# Altium PCB Huitzil2.PcbDoc
Units mm, origin at the board's own origin, x right, y up, seen from the top; angles counter-clockwise.
Board outline 100.03 x 55.02 mm, 2 copper layers (Top Layer, Bottom Layer); 17 components, 42 nets, 89 pads, 0 vias.
Unrouted connection lines stored in the file: 9.
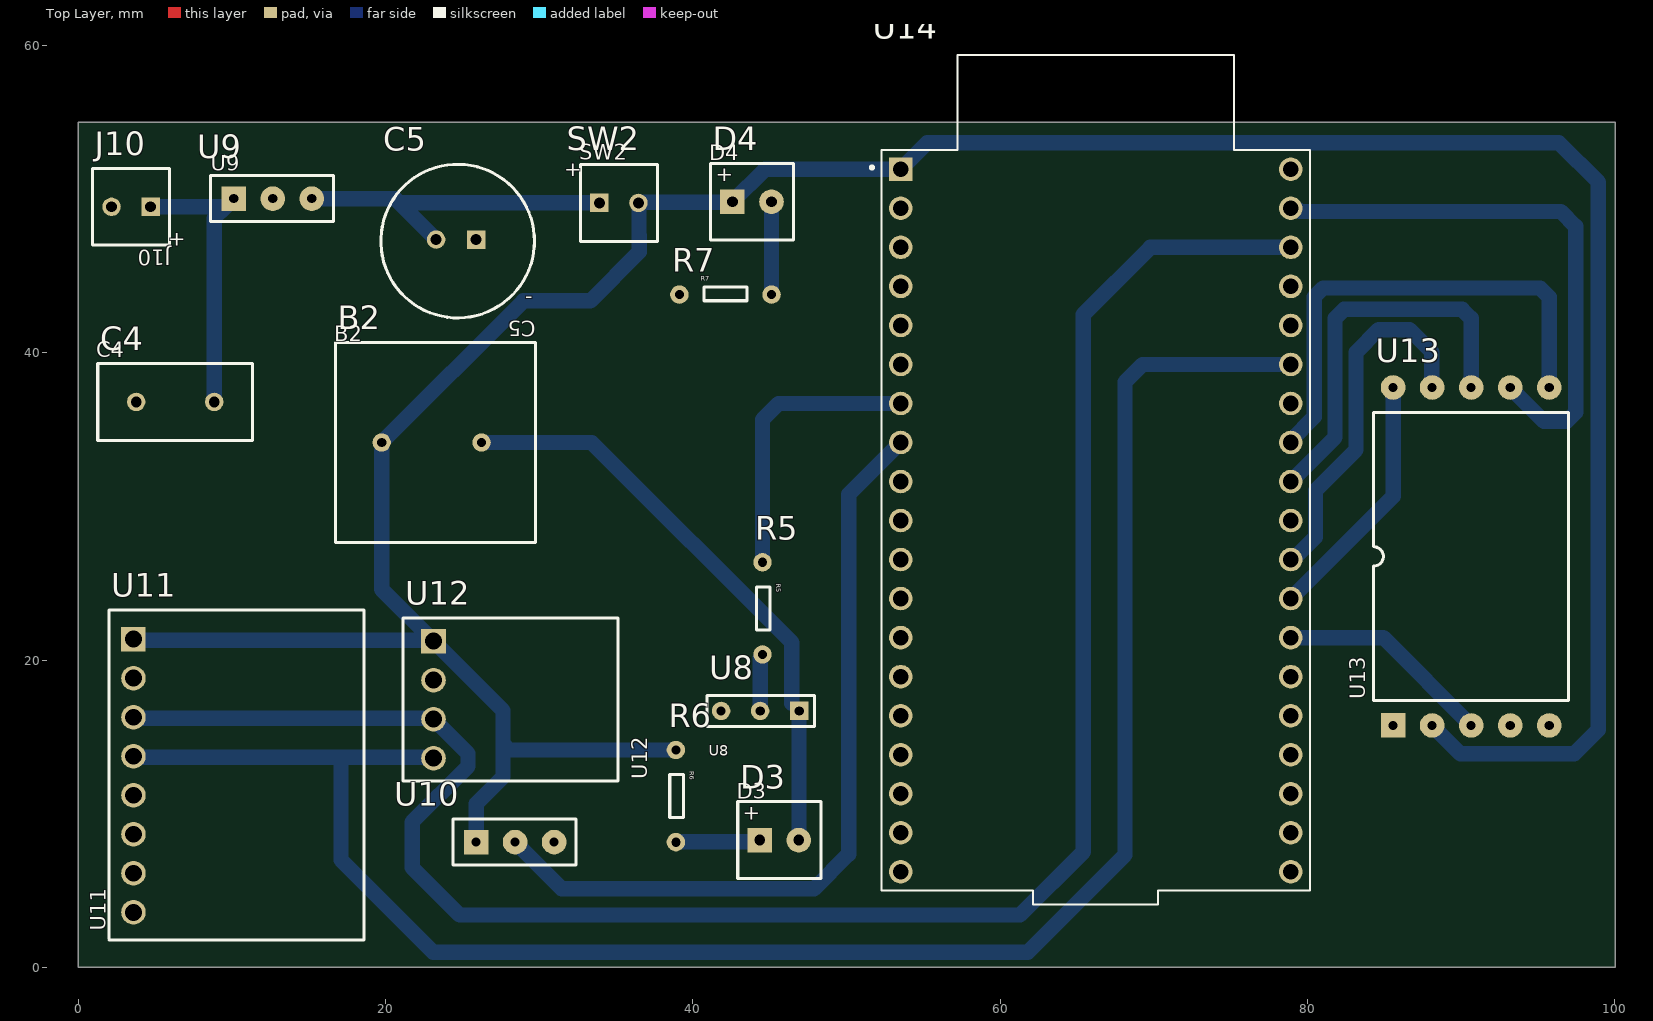
[diagram p0: Top Layer view]
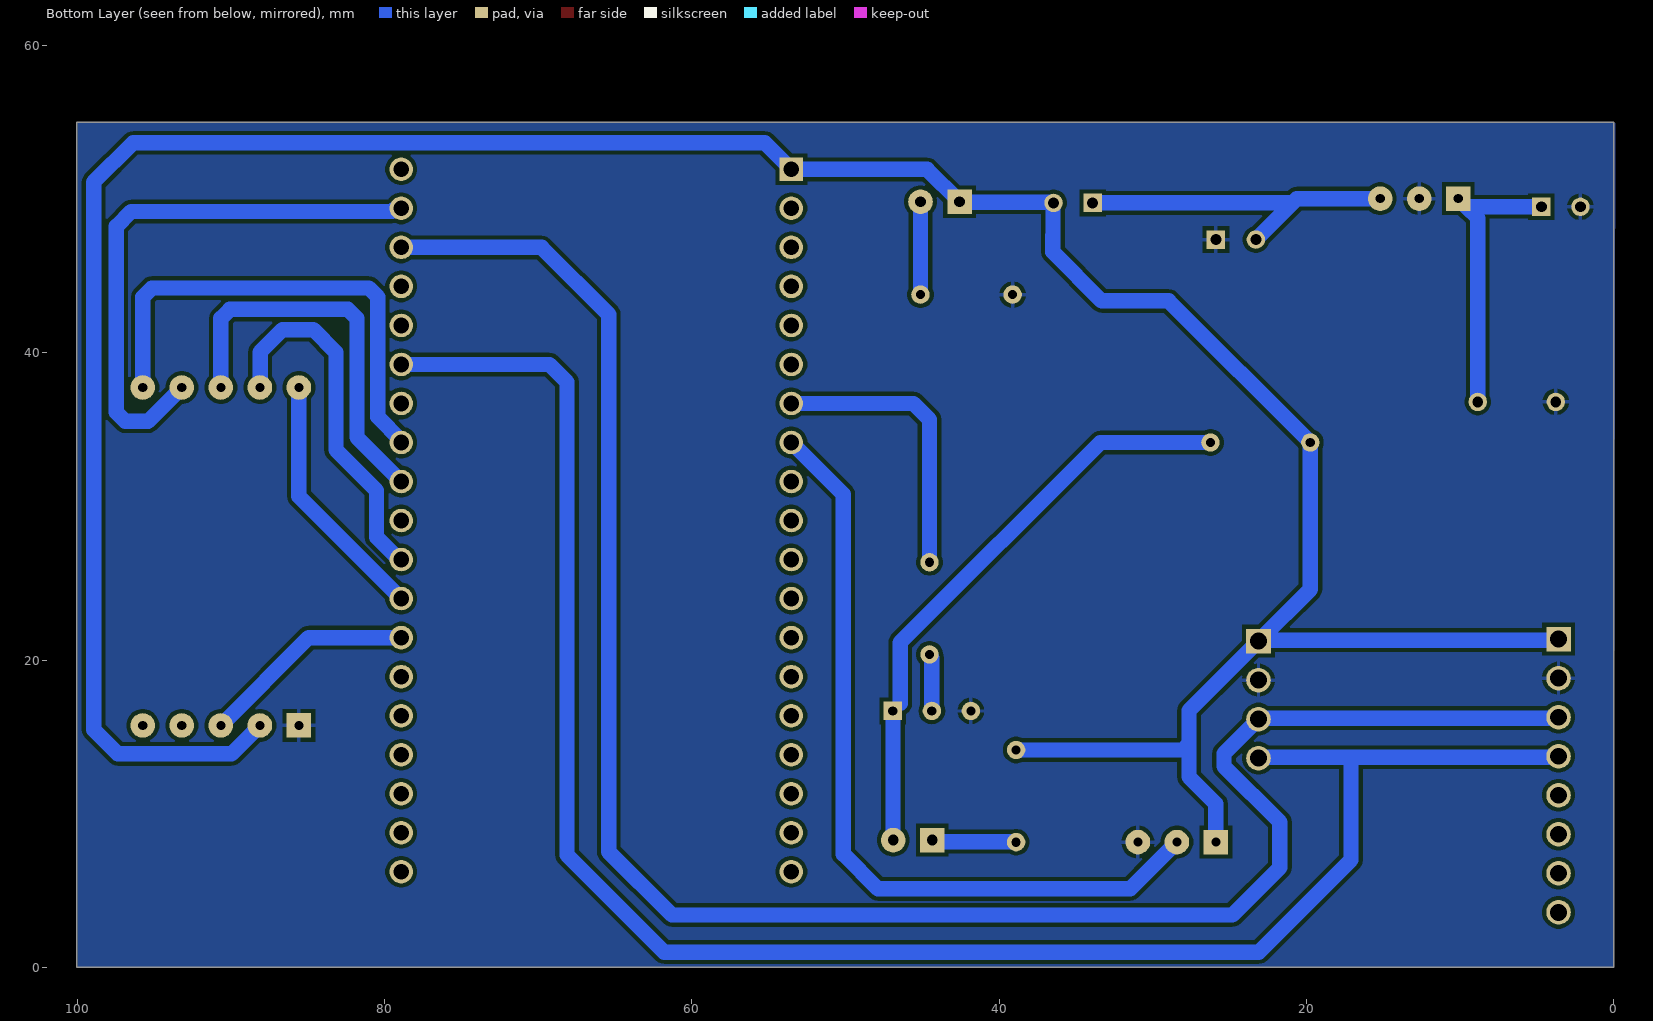
[diagram p1: Bottom Layer view, seen from below]
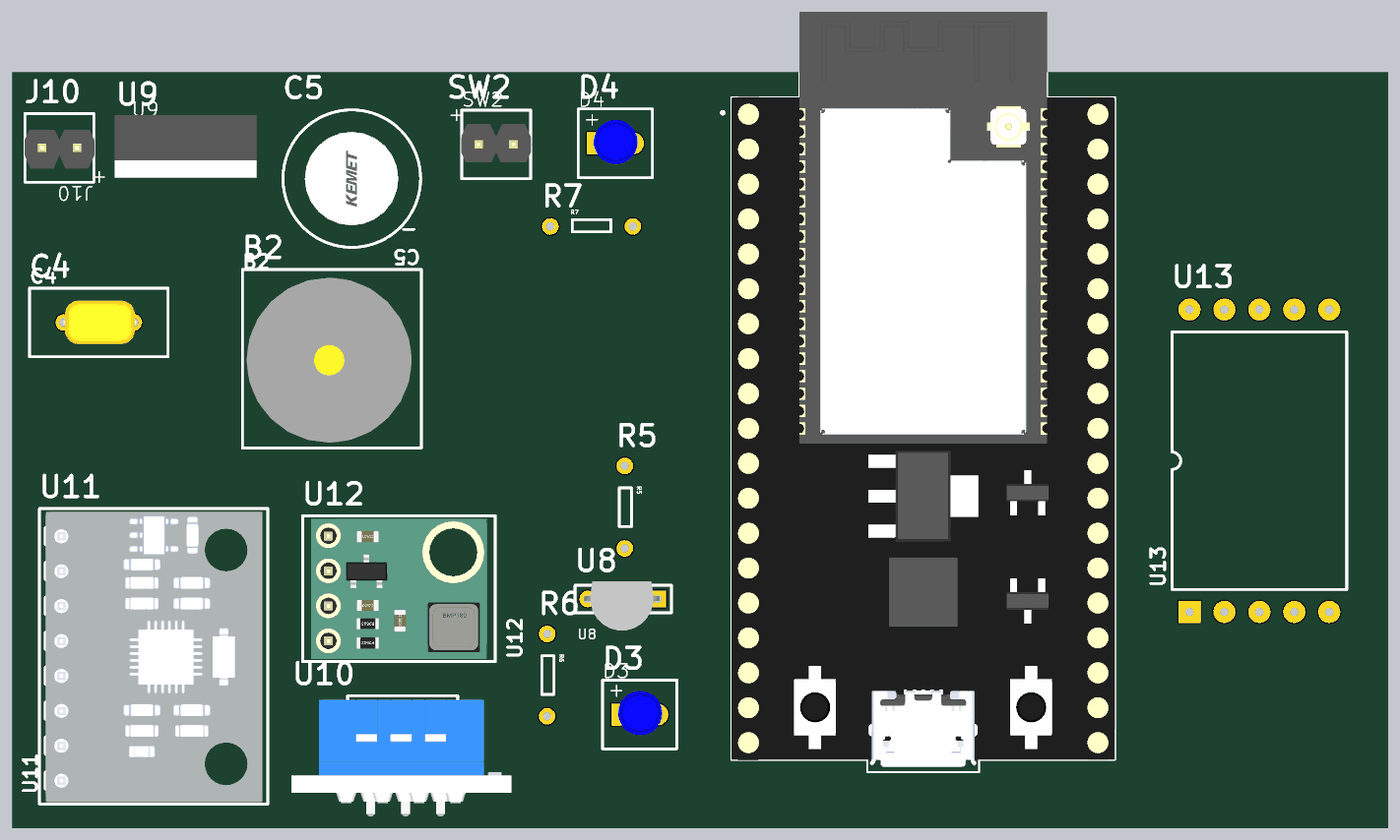
[diagram p2: 3D render of the assembled board from above, using the file's embedded part models]

## Layer stack, top to bottom
Top Solder: solder mask 0.0102, Solder Resist, Dk 3.5
Top Layer: signal copper 0.0356
Dielectric 1: dielectric 0.32, FR-4, Dk 4.8
Bottom Layer: signal copper 0.0356
Bottom Solder: solder mask 0.0102, Solder Resist, Dk 3.5

## Board outline
0,0 0,55.016 100.025,55.016 100.025,0

## Design rules (kind name [scope] priority, off if disabled: settings)
Clearance [All vs InNet('No Net')] p1: gap=2 ignorepadtopadclearanceinfootprint=FALSE
PolygonConnect [All] p1: connectstyle=Relief reliefconductorwidth=0.254 reliefentries=4 polygonreliefangle="90 Angle" airgapwidth=0.254
RoutingVias [All] p1: holewidth=0.711 width=1.27 viastyle="Through Hole" minholewidth=0.711 minwidth=1.27 maxholewidth=0.711 maxwidth=1.27
SolderMaskExpansion [All] p1: expansion=0.102 istentingtop=FALSE
Width [All] p1: maxlimit=1 minlimit=1 preferedwidth=1
30 further rules are at their usual default settings.

## Classes and differential pairs
component class Huitzil2: B2 C4 C5 D3 D4 J10 R5 R6 R7 SW2 U8 U9 U10 U11 U12 U14

## Components (designator, comment, footprint, x,y, rotation, side; value= is the part's Value field where it differs from the comment)
B2 "Buzzer" BUZZER 19.738,34.163 r0 top
C4 "100nF" "CERAMIC CAP" 3.759,36.805 r0 top
C5 "2.2uF" "Electrolytic capacitor 2mm" 25.883,47.371 r180 top
D3 "0805 LED" 3mm_LED 44.348,8.28 r0 top
D4 "0805 LED" 3mm_LED 42.57,49.835 r0 top
J10 "PWR_CONNECTOR" BATT 4.699,49.505 r180 top
R5 "330R" "THT RESISTOR" 44.526,26.365 r270 top
R6 "330R" "THT RESISTOR" 38.887,14.148 r270 top
R7 "330R" "THT RESISTOR" 39.116,43.79 r0 top
SW2 "PWR_SW" PWR-SW 33.909,49.759 r0 top
U8 "NPN Transistor" 2N2222A 46.914,16.688 r270 top
U9 "3V3_REG" LF33CV 10.109,50.038 r90 top
U10 "DHT11" DHT11 25.883,8.153 r90 top
U11 "MPU6050" MPU6050 3.581,12.471 r0 top
U12 "BMP180" BMP180 23.114,21.234 r0 top
U13 "RFM95W" "Bluee LoRa" 85.573,15.744 r90 top
U14 "ESP32-DEVKITC-32U" MODULE_ESP32-DEVKITC-32U 66.218,29.093 r0 top

## Footprints (in the part's own frame and the unit in brackets; to place one, negate y for a bottom-side part, rotate by r counter-clockwise, add the part's x,y. Pads: shape width x height; smd on the part's side, far side on the other; paste and mask are expansions set on the pad)
2N2222A [mm]
  rect 1.2x1.2 hole 0.6: 1(0,0)
  round 1.2 hole 0.6: 2(0,-2.54) 3(0,-5.08)
  silkscreen extent -1,-6 1,1, body extent -1.3,-5.34 2.3,0.14, height 17.11
3mm_LED [mm]
  rect 1.6x1.6 hole 0.7: 1(0,0)
  round 1.6 hole 0.7: 2(2.54,0)
  silkscreen extent -1.43,-2.5 3.97,2.5, body extent -0.3,-1.5 2.9,1.7, height 5.81
BATT [mm]
  rect 1.2x1.2 hole 0.7: 1(0,0)
  round 1.2 hole 0.7: 2(2.54,0)
  silkscreen extent -1.23,-2.5 3.77,2.5, body extent -1.28,-1.3 3.8,1.5, height 8.06
"Bluee LoRa" [mm]
  rect 1.6x1.6 hole 0.6: 1(0,0)
  round 1.6 hole 0.6: 2(0,-2.54) 3(0,-5.08) 4(0,-7.62) 5(0,-10.16) 6(22,0) 7(22,-2.54) 8(22,-5.08) 9(22,-7.62) 10(22,-10.16)
  silkscreen extent 1.63,-11.43 20.37,1.27
BMP180 [mm]
  rect 1.6x1.6 hole 1.1: 1(0,0)
  round 1.6 hole 1.1: 2(0,-2.54) 3(0,-5.08) 4(0,-7.62)
  silkscreen extent -2,-9.1 12,1.5, body extent -1.4,-8.9 11.4,1.3, height 5.6
BUZZER [mm]
  round 1.2 hole 0.6: 1(0,0) 2(6.5,0)
  silkscreen extent -3,-6.5 10,6.5, body extent -2.7,-6.1 9.29,5.9, height 8.76
"CERAMIC CAP" [mm]
  round 1.2 hole 0.7: 1(0,0) 2(5.08,0)
  silkscreen extent -2.5,-2.5 7.58,2.5, body extent -0.22,-1.59 5.42,1.6, height 13.63
DHT11 [mm]
  rect 1.6x1.6 hole 0.6: 1(0,0)
  round 1.6 hole 0.6: 2(0,-2.54) 3(0,-5.08)
  silkscreen extent -1.5,-6.5 1.5,1.5, body extent -7.3,-10.4 1.2,5.6, height 21.36
"Electrolytic capacitor 2mm" [mm]
  rect 1.2x1.2 hole 0.7: 1(0,0)
  round 1.2 hole 0.7: 2(2.6,0)
  silkscreen extent -3.8,-4.9 6.2,5.1, body extent -2.17,-3.3 4.6,3.5, height 12.52
LF33CV [mm]
  rect 1.6x1.6 hole 0.6: 1(0,0)
  round 1.6 hole 0.6: 2(0,-2.54) 3(0,-5.08)
  silkscreen extent -1.5,-6.5 1.5,1.5, body extent -2.7,-7.65 1.87,2.65, height 22.24
MODULE_ESP32-DEVKITC-32U [mm]
  rect 1.53x1.53 / inner round 1.53 / far side rect 1.53x1.53 hole 1.02 mask+0.05: 1(-12.7,22.85)
  round 1.53 hole 1.02 mask+0.05: 2(-12.7,20.31) 3(-12.7,17.77) 4(-12.7,15.23) 5(-12.7,12.69) 6(-12.7,10.15) 7(-12.7,7.61) 8(-12.7,5.07) 9(-12.7,2.53) 10(-12.7,-0.01) 11(-12.7,-2.55) 12(-12.7,-5.09) 13(-12.7,-7.63) 14(-12.7,-10.17) 15(-12.7,-12.71) 16(-12.7,-15.25) 17(-12.7,-17.79) 18(-12.7,-20.33) 19(-12.7,-22.87) 20(12.7,-22.87) 21(12.7,-20.33) 22(12.7,-17.79) 23(12.7,-15.25) 24(12.7,-12.71) 25(12.7,-10.17) 26(12.7,-7.63) 27(12.7,-5.09) 28(12.7,-2.55) 29(12.7,-0.01) 30(12.7,2.53) 31(12.7,5.07) 32(12.7,7.61) 33(12.7,10.15) 34(12.7,12.69) 35(12.7,15.23) 36(12.7,17.77) 37(12.7,20.31) 38(12.7,22.85)
  silkscreen extent -14.67,-25 13.95,30.3, body extent -13.95,-24.62 13.95,30.3, height 7.95
MPU6050 [mm] "6DOF IMU"
  rect 1.6x1.6 hole 1.1: 1(0,8.89)
  round 1.6 hole 1.1: 2(0,6.35) 3(0,3.81) 4(0,1.27) 5(0,-1.27) 6(0,-3.81) 7(0,-6.35) 8(0,-8.89)
  silkscreen extent -1.6,-10.7 15,10.8, body extent -1.28,-10.55 14.6,10.55, height 6.11
PWR-SW [mm] "Mechanical power switch"
  rect 1.2x1.2 hole 0.7: 1(0,0)
  round 1.2 hole 0.7: 2(2.54,0)
  silkscreen extent -1.23,-2.5 3.77,2.5, body extent -1.28,-1.3 3.8,1.5, height 8.06
"THT RESISTOR" [mm]
  round 1.2 hole 0.6: 1(0,0) 2(6,0)
  silkscreen extent 1.6,-0.4 4.4,0.5

## Part data
B2: library part BUZZER, "Active buzzer"
C4: library part CAP, "Ceramic through-hole capacitor"
C5: library part E_CAP_2.2uF, "Throug-hole 2.2uF"
D3 D4: library part LED, "Through-hole LED"
J10: library part PWR-CONN, "THT Connector"
R5 R6 R7: library part Resistor, "Through-hole resistor"
SW2: library part SWITCH, "Mechanical through-hole switch"
U8: library part 2N2222, "Through-hole NPN Transistor"
U9: library part LF33CV, "Through-hole 3.3V regulator"
U10: "Humidity and temperature sensor"
U11: "6DOF IMU sensor"
U12: "Bosch Pressure Sensor"
U13: library part RMF95W, "915 MHz LoRa Transceiver"
U14: "ESP32-WROOM-32UE series Transceiver; 802.11 b/g/n (Wi-Fi, WiFi, WLAN), BluetoothÂ® Smart Ready 4.x Dual Mode Evaluation Board", Package=None, Availability="In Stock", Check_prices=https://www.snapeda.com/parts/ESP32-DEVKITC-32U/Espressif+Systems/view-part/?ref=eda, MF="Espressif Systems", MP=ESP32-DEVKITC-32U, Price=None, Purchase-URL=https://pricing.snapeda.com/search/part/ESP32-DEVKITC-32U/?ref=eda, SnapEDA_Link=https://www.snapeda.com/parts/ESP32-DEVKITC-32U/Espressif+Systems/view-part/?ref=snap

## Nets (pads, with @x,y where several pads share a name; then routed paths per layer and width w, separated by ;. In a path a pad name is that pad's centre, name@x,y a point inside that pad or via, vN(x,y) a via of type N, cw(c..) or ccw(c..) an arc to the next point about the centre after c; other vN are vias at no path point)
3V3: B2.1 D4.1 R6.1 SW2.2 U10.1 U11.1 U12.1 U13.2 U14.1 | length 199.1
  Bottom Layer w1: U11.1 3.645,21.298 U12.1@23.05,21.298 ; U10.1 25.883,10.643 27.635,12.395 27.635,14.554 ; R6.1 28.042,14.148 27.635,14.554 ; U13.2 89.963,13.894 97.358,13.894 98.933,15.469 98.933,51.105 96.368,53.67 55.245,53.67 U14.1 44.679,51.943 D4.1 42.532,49.797 36.487,49.797 SW2.2 36.487,49.72 36.487,47.666 36.5,47.654 36.5,46.558 33.325,43.383 28.958,43.383 B2.1 19.738,24.61 U12.1@23.05,21.298 ; U12.1@23.05,21.298 U12.1 27.635,16.713 27.635,14.554
3V3a: 
3V3b: 
3V3c: 
32: R5.1 U14.7 | length 18.7
  Bottom Layer w1: R5.1 44.526,35.662 45.568,36.703 U14.7
CK: 
DHT11: U10.2 U14.8 | length 52.1
  Bottom Layer w1: U10.2 31.471,5.105 47.879,5.105 50.14,7.366 50.14,30.785 U14.8
GND: C4.1 C5.1 J10.2 R7.1 U8.3 U9.2 U10.3 U11.2 U12.2 U13.1
GNDa: 
GNDb: 
GNDc: 
IO0: 
LED: 
LoRacs: U13.7 U14.28 | length 23.8
  Bottom Layer w1: U14.28 79.061,26.543 80.518,28 80.518,31.039 83.16,33.68 83.16,40.03 84.633,41.504 86.639,41.504 88.099,40.044 88.099,37.758 U13.7
LoRaDIO0: U13.3 U14.26 | length 14.1
  Bottom Layer w1: U14.26 84.934,21.463 U13.3
LoRarst: U13.6 U14.27 | length 16.5
  Bottom Layer w1: U14.27 85.573,30.658 U13.6
MI: 
MISO: U13.10 U14.31 | length 31.8
  Bottom Layer w1: U14.31 78.918,34.306 80.437,35.825 80.437,43.636 81.023,44.221 95.147,44.221 95.733,43.636 U13.10
MO: 
MOSI: U13.9 U14.37 | length 36.6
  Bottom Layer w1: U14.37 79.019,49.302 79.394,49.302 79.496,49.2 96.495,49.2 97.46,48.235 97.46,36.128 96.874,35.542 95.395,35.542 U13.9
NetB1_2: 
NetB2_2: B2.2 D3.2 U8.1 | length 38
  Bottom Layer w1: B2.2 33.401,34.163 46.431,21.133 U8.1@46.431,17.17 ; D3.2 46.901,8.293 46.901,16.675 U8.1
NetC1_2: 
NetC2_2: 
NetC3_1: 
NetC4_2: C4.2 J10.1 U9.1 | length 18.6
  Bottom Layer w1: J10.1 U9.1@9.576,49.505 ; C4.2 8.839,48.768 U9.1@9.576,49.505 ; U9.1 U9.1@9.576,49.505
NetC5_2: C5.2 SW2.1 U9.3 | length 22.2
  Bottom Layer w1: U9.3 20.616,50.038 20.895,49.759 ; C5.2 20.895,49.759 ; SW2.1 20.895,49.759
NetC6_1: U14.2
NetD1_1: 
NetD2_2: 
NetD3_1: D3.1 R6.2 | length 5.5
  Bottom Layer w1: R6.2 38.926,8.186 44.254,8.186 D3.1
NetD4_2: D4.2 R7.2 | length 6
  Bottom Layer w1: D4.2 45.113,49.832 45.113,43.792 R7.2
NetR1_2: 
NetR4_2: 
NetR5_2: R5.2 U8.2 | length 3.7
  Bottom Layer w1: U8.2 44.374,20.159 44.526,20.311 R5.2
RST: 
SCK: U13.8 U14.30 | length 25.6
  Bottom Layer w1: U14.30 81.788,34.493 81.788,42.239 82.374,42.824 90.067,42.824 90.653,42.239 U13.8
SCL: U11.3 U12.3 U14.36 | length 128.6
  Bottom Layer w1: U11.3 3.645,16.218 23.05,16.218 U12.3 25.354,13.914 25.354,13.086 21.717,9.449 21.717,6.502 24.816,3.404 61.29,3.404 65.405,7.518 65.405,42.494 69.774,46.863 U14.36
SCLa: 
SDA: U11.4 U12.4 U14.33 | length 124.5
  Bottom Layer w1: U11.4 3.645,13.678 17.247,13.678 ; U12.4 23.05,13.678 17.247,13.678 ; U14.33 69.266,39.243 68.123,38.1 68.123,7.315 61.798,0.991 23.089,0.991 17.094,6.985 17.094,13.525 17.247,13.678
SDAa: 
SS: 
pads on no net: U11.5 U11.6 U11.7 U11.8 U13.4 U13.5 U14.3 U14.4 U14.5 U14.6 U14.9 U14.10 U14.11 U14.12 U14.13 U14.14 U14.15 U14.16 U14.17 U14.18 U14.19 U14.20 U14.21 U14.22 U14.23 U14.24 U14.25 U14.29 U14.32 U14.34 U14.35 U14.38

## Polygon pours and split planes (outlines as drawn)
GND on Bottom Layer "GND_L02_P000" (solid, pour order 0): -0.102,55.016 99.974,55.016 99.974,0.076 100.025,0.025 0.025,0.025

## Silkscreen, mask and mechanical layers (free items; w line width, h text height)
Mechanical 1:
  the board outline again, w0.2

## Text inside footprints (layer, text, board x,y; h text height)
C5: Top Overlay "-" at 29.583,43.971 h1 r180
D3: Top Overlay "+" at 43.248,9.614 h1
D4: Top Overlay "+" at 41.47,51.168 h1
J10: Top Overlay "+" at 6.999,47.771 h1 r180
SW2: Top Overlay "+" at 31.609,51.492 h1